# Altium PCB DC-DC TPS54627DDAR-PCB.PcbDoc
Units mil, origin at the board's own origin, x right, y up, seen from the top; angles counter-clockwise.
Board outline not stored, 2 copper layers (Top Layer, Bottom Layer); 13 components, 0 nets, 33 pads, 0 vias.
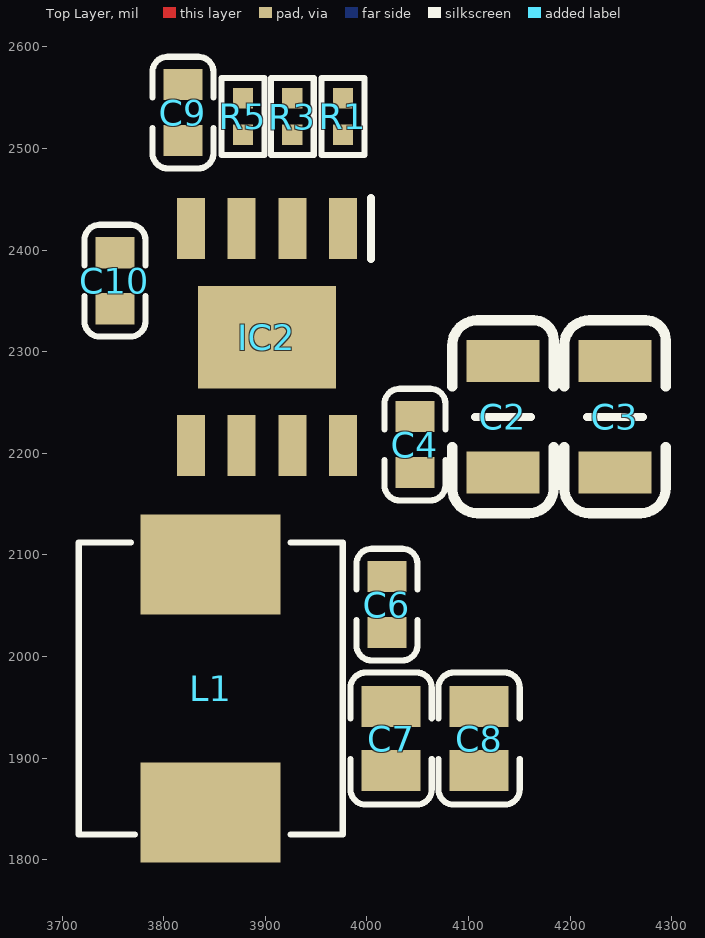
[diagram p0: Top Layer view]
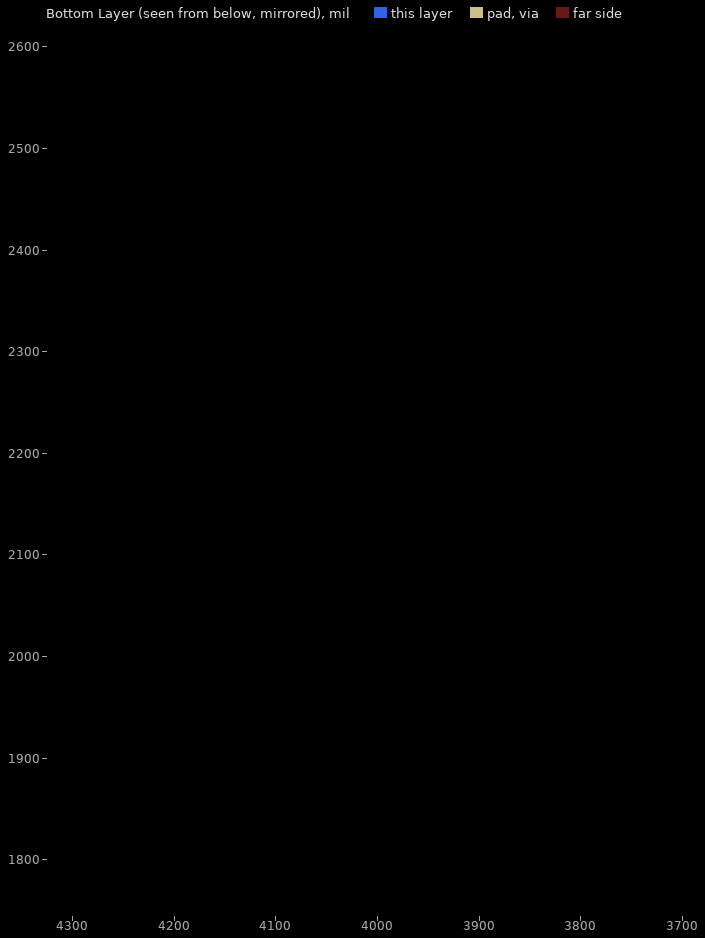
[diagram p1: Bottom Layer view, seen from below]

## Layer stack, top to bottom
Top Solder: solder mask 0.4, Solder Resist, Dk 3.5
Top Layer: signal copper 1.4
Dielectric 1: dielectric 12.6, FR-4, Dk 4.8
Bottom Layer: signal copper 1.4
Bottom Solder: solder mask 0.4, Solder Resist, Dk 3.5

## Components (designator, comment, footprint, x,y, rotation, side; value= is the part's Value field where it differs from the comment)
C2 "10uF 50V" 1206C 4133.86,2236.06 r270 top
C3 "10uF 50V" 1206C 4244.09,2236.06 r270 top
C4 "100nF 50V" 0603C 4047.24,2208.66 r270 top
C6 "100nF 50V" 0603C 4019.69,2051.18 r90 top
C7 "22uF 25V" 0805C 4023.78,1919.29 r270 top
C8 "22uF 25V" 0805C 4110.39,1919.29 r270 top
C9 "1uF 50V" 0603C 3818.9,2535.43 r90 top
C10 "8.2nF" 0603C 3751.97,2370 r90 top
IC2 "TPS54627DDAR" SOIC127P600X170-9N 3901.57,2314.49 r270 top
L1 "3.3uH 6.5A" "SMD 7.3x6.6" 3846.19,1968.5 r270 top
R1 "10K" 0402R 3976.38,2531.5 r90 top
R3 "124K" 0402R 3926.57,2531.5 r270 top
R5 "22.1K" 0402R 3877.95,2531.5 r270 top

## Footprints (in the part's own frame and the unit in brackets; to place one, negate y for a bottom-side part, rotate by r counter-clockwise, add the part's x,y. Pads: shape width x height; smd on the part's side, far side on the other; paste and mask are expansions set on the pad)
0402R [mil]
  rect 20x20 smd: 1(-18,0) 2(18,0)
  silkscreen extent -38,-21 38,21, body extent -20,-11 20,11, height 16
0603C [mm]
  rect 0.78x0.98 smd: 1(-0.7,0) 2(0.7,0)
  silkscreen extent -1.4,-0.76 1.4,0.76, body extent -0.8,-0.4 0.8,0.4, height 0.87
0805C [mm]
  rect 1.02x1.47 smd: 1(-0.8,0) 2(0.8,0)
  silkscreen extent -1.65,-1.02 1.65,1.02, body extent -1,-0.62 1,0.63, height 0.88
1206C [mm]
  rect 1.05x1.82 smd: 1(-1.39,0) 2(1.39,0)
  silkscreen extent -2.41,-1.27 2.41,1.27, body extent -1.6,-0.8 1.6,0.8, height 1.8
"SMD 7.3x6.6" [mm]
  rect 2.5x3.5 smd: 1(-3.1,0) 2(3.1,0)
  silkscreen extent -3.65,-3.3 3.65,3.3, body extent -3.61,-3.3 3.6,3.3, height 3
SOIC127P600X170-9N [mm]
  rect 1.525x0.7 smd: 1(-2.712,1.905) 2(-2.712,0.635) 3(-2.712,-0.635) 4(-2.712,-1.905) 5(2.712,-1.905) 6(2.712,-0.635) 7(2.712,0.635) 8(2.712,1.905)
  rect 2.56x3.45 smd: 9(0,0)
  silkscreen extent -3.47,2.61 -1.95,2.61, body extent -3,-2.45 3,2.45, height 1.7

## Part data
C2 C3 C4 C6 C7 C8 C9 C10: library part CAP-NP
IC2: "Integrated Circuit", Manufacturer_Name="Texas Instruments", Mouser Part Number=595-TPS54627DDAR, Arrow Part Number=TPS54627DDAR, Arrow Price/Stock=https://www.arrow.com/en/products/tps54627ddar/texas-instruments, Datasheet Link=http://www.ti.com/lit/gpn/tps54627, Height=1.7mm, Manufacturer_Part_Number=TPS54627DDAR, Mouser Price/Stock=https://www.mouser.com/Search/Refine.aspx?Keyword=595-TPS54627DDAR
L1: library part INDUCTOR, "MHCI06030-3R3M-R8A", LCSC=C280586, ComponentLink1Description=LCSC, ComponentLink1URL=https://item.szlcsc.com/267006.html
R1 R3 R5: library part RES

## Nets (pads, with @x,y where several pads share a name; then routed paths per layer and width w, separated by ;. In a path a pad name is that pad's centre, name@x,y a point inside that pad or via, vN(x,y) a via of type N, cw(c..) or ccw(c..) an arc to the next point about the centre after c; other vN are vias at no path point)
pads on no net: C2.1 C2.2 C3.1 C3.2 C4.1 C4.2 C6.1 C6.2 C7.1 C7.2 C8.1 C8.2 C9.1 C9.2 C10.1 C10.2 IC2.1 IC2.2 IC2.3 IC2.4 IC2.5 IC2.6 IC2.7 IC2.8 IC2.9 L1.1 L1.2 R1.1 R1.2 R3.1 R3.2 R5.1 R5.2